# EAGLE board OOBD-Cup_v6 (EAGLE 5.11)
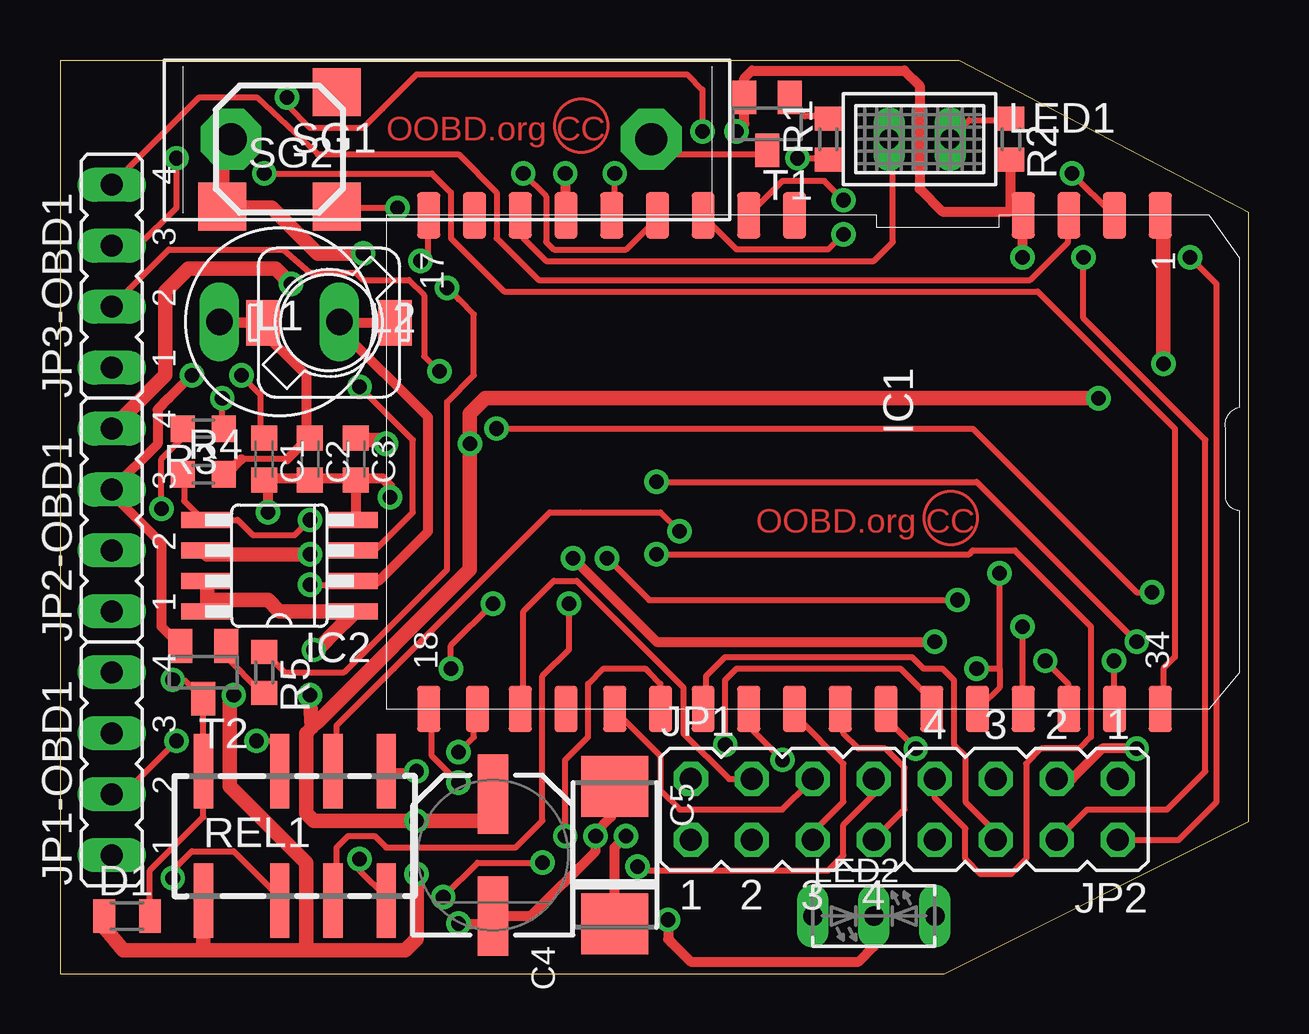
[diagram p0: board, top side]
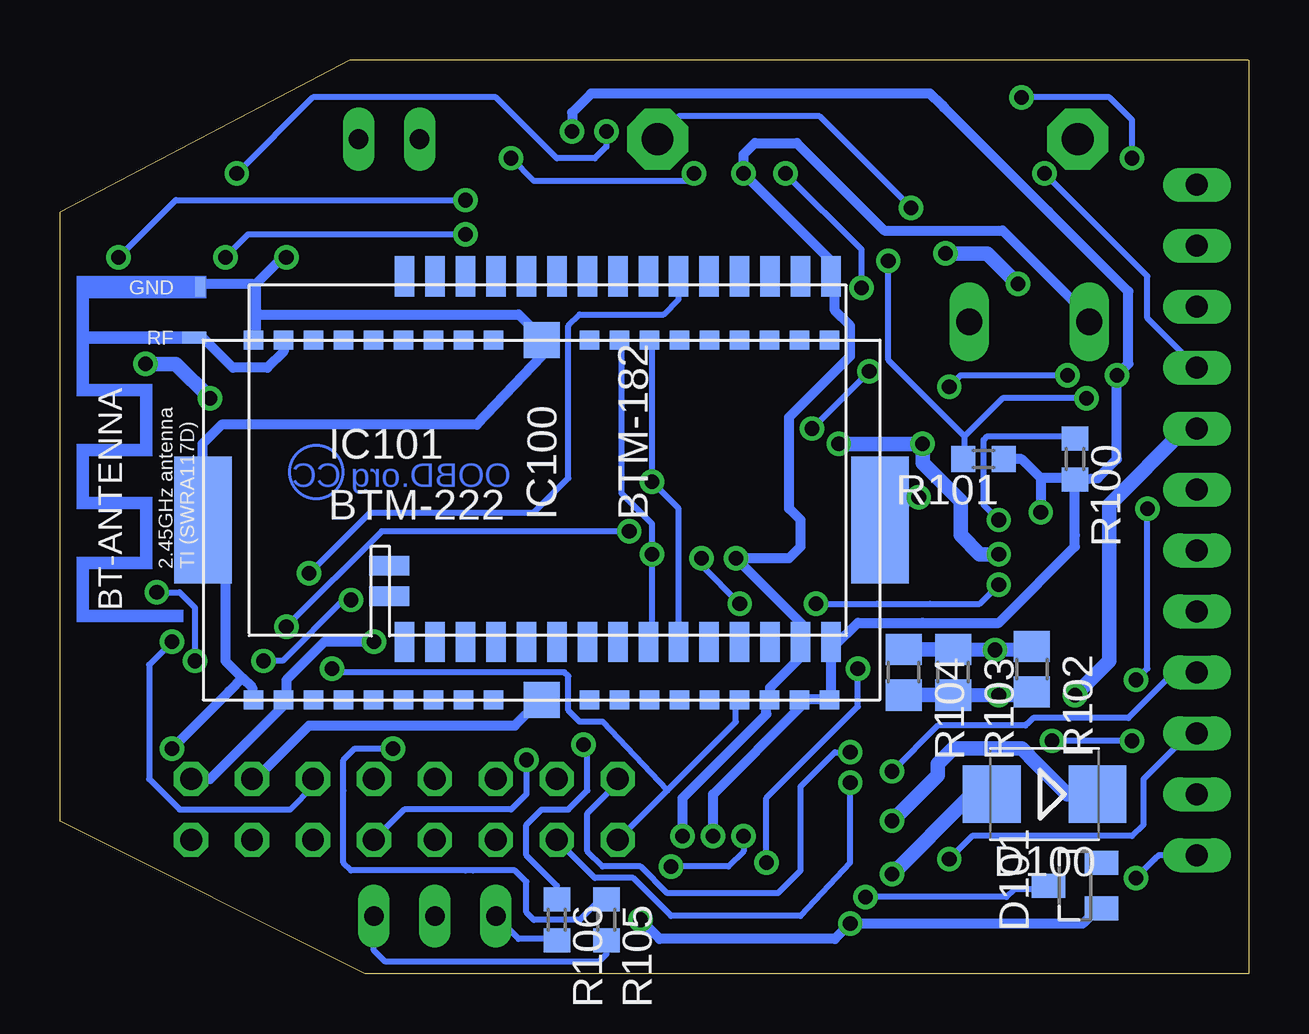
[diagram p1: board, bottom side, seen from below]

Size 49.53 x 38.1 mm. Coordinates in mm from the lower left corner, seen from the top.
Outline: 0,38.09 0,0 36.84,0 49.53,6.35
Outline: 0.01,38.1 37.46,38.1
Outline: 37.46,38.09 49.53,31.75 49.53,6.36
Copper layers (1*16): Top 0.035mm / dielectric 1.5mm / Bottom 0.035mm
Design rules "default *": minimum track width 10mil, minimum drill 24mil, track to track 8mil, track to pad 8mil, pad to pad 8mil, via to via 8mil, smd to smd 8mil, copper to edge 12mil, drill to drill 8mil, minimum pad ring 10mil, minimum via ring 8mil, stop-mask expansion 4mil, vias tented up to drill 0mil, thermal gap 10mil

## Footprints (pad centres in the part's own frame; a part is rotated, then mirrored left to right if it is on the bottom)
SWRA117D_RIGHT = smd 0.813 x 0.406: GND -0.45,0.25 | smd 0.508 x 1.016: RF -2.55,0.5
C0603K = smd 1.05 x 1.08: 1 -0.875,0; 2 0.875,0
SV-D = smd 3.302 x 1.27: + -2.54,0; - 2.54,0
C6032-TE-C = smd 2.54 x 2.794: + 2.857,0; - -2.857,0
MICROMELF-W = smd 0.9 x 1.4: A 0.95,0; C -0.95,0
SMB = smd 2.4 x 2.4: A 2.2,0; C -2.2,0
SOT23 = smd 1 x 1.4: 1 -0.95,-1.1; 2 0.95,-1.1; 3 0,1.1
DMX1-MINI = smd 1.93 x 0.965: 1 0,32.258; 2 0,30.353; 3 0,28.448; 4 0,26.543; 9 0,17.018; 10 0,15.113; 11 0,13.208; 12 0,11.303; 13 0,9.398; 14 0,7.493; 15 0,5.588; 16 0,3.683; 17 0,1.778; 18 20.574,1.778; 19 20.574,3.81; 20 20.574,5.588; 21 20.574,7.493; 22 20.574,9.525; 23 20.574,11.43; 24 20.574,13.208; 25 20.574,15.113; 26 20.574,17.018; 27 20.574,18.923; 28 20.574,20.828; 29 20.574,22.733; 30 20.574,24.638; 31 20.574,26.543; 32 20.574,28.448; 33 20.574,30.353; 34 20.574,32.258
SO8 = smd 0.66 x 2.032: 1 -1.905,-3.073; 2 -0.635,-3.073; 3 0.635,-3.073; 4 1.905,-3.073; 5 1.905,3.073; 6 0.635,3.073; 7 -0.635,3.073; 8 -1.905,3.073
BTM-182 = smd 1.676 x 0.813: P$1 -7.62,7.62; P$2 -7.62,6.35; P$3 -7.62,5.08; P$4 -7.62,3.81; P$5 -7.62,2.54; P$6 -7.62,1.27; P$7 -7.62,0; P$8 -7.62,-1.27; P$9 -7.62,-2.54; P$10 -7.62,-3.81; P$11 -7.62,-5.08; P$12 -7.62,-6.35; P$13 -7.62,-7.62; P$14 -7.62,-8.89; P$15 -7.62,-10.16; P$16 7.62,-10.16; P$17 7.62,-8.89; P$18 7.62,-7.62; P$19 7.62,-6.35; P$20 7.62,-5.08; P$21 7.62,-3.81; P$22 7.62,-2.54; P$23 7.62,-1.27; P$24 7.62,0; P$25 7.62,1.27; P$26 7.62,2.54; P$27 7.62,3.81; P$28 7.62,5.08; P$29 7.62,6.35; P$30 7.62,7.62 | smd 0.813 x 1.676: P$31 -4.445,8.255; P$32 -5.715,8.255
BTM-222 = smd 0.8 x 0.8: P$1 -12.635,-7.5; P$2 -11.385,-7.5; P$3 -10.135,-7.5; P$4 -8.885,-7.5; P$5 -7.635,-7.5; P$6 -6.385,-7.5; P$7 -5.135,-7.5; P$8 -3.885,-7.5; P$9 -2.635,-7.5; P$11 1.365,-7.5; P$12 2.615,-7.5; P$13 3.865,-7.5; P$14 5.115,-7.5; P$15 6.365,-7.5; P$16 7.615,-7.5; P$17 8.865,-7.5; P$18 10.115,-7.5; P$19 11.365,-7.5; P$20 11.365,7.5; P$21 10.115,7.5; P$22 8.865,7.5; P$23 7.615,7.5; P$24 6.365,7.5; P$25 5.115,7.5; P$26 3.865,7.5; P$27 2.615,7.5; P$28 1.365,7.5; P$30 -2.635,7.5; P$31 -3.885,7.5; P$32 -5.135,7.5; P$33 -6.385,7.5; P$34 -7.635,7.5; P$35 -8.885,7.5; P$36 -10.135,7.5; P$37 -11.385,7.5; P$38 -12.635,7.5 | smd 1.5 x 1.5: P$10 -0.635,-7.5; P$29 -0.635,7.5 | smd 2.4 x 5.3: P$AGND -14.735,0; P$BGND 13.465,0
JP4Q = drill 0.914 octagon: 1 -3.81,-1.27; 2 -3.81,1.27; 3 -1.27,-1.27; 4 -1.27,1.27; 5 1.27,-1.27; 6 1.27,1.27; 7 3.81,-1.27; 8 3.81,1.27
JP4 = drill 0.914 long: 1 -3.81,0; 2 -1.27,0; 3 1.27,0; 4 3.81,0
07HCP-XXXX-50 = drill 1.1 long: 1 -2.5,0; 2 2.5,0
PIS2408 = smd 1.9 x 1.4: P$1 0,2.75; P$2 0,-2.75
U57X32 = drill 0.813 long: A -1.27,0; K 1.27,0
DUOLED2X5 = drill 0.813 long: AG -2.54,0; AR 2.54,0; K 0,0
R0603 = smd 1 x 1.1: 1 -0.85,0; 2 0.85,0
R0805 = smd 1.3 x 1.5: 1 -0.95,0; 2 0.95,0
FTR-B4GA = smd 0.8 x 3.1: 1 -3.8,-3.167; 2 -0.625,-3.167; 3 1.597,-3.167; 4 3.82,-3.167; 5 3.82,2.23; 6 1.597,2.23; 7 -0.625,2.23; 8 -3.8,2.23
PMB24F/V = drill 1.321 pad 2.54 octagon: 1 -9.004,0; 2 8.504,0
BME0603SA = smd 2 x 2: (+)LEAD 4.295,0.425; (-)LEAD -0.475,0.425; NC -0.475,-4.345

## Placement (x,y rotation side)
BT-ANTENNA  [SWRA117D_RIGHT]  43.43,29.08 90 bottom
C1  270pF  [C0603K]  8.51,21.46 270 top
C2  1µF  [C0603K]  10.41,21.46 270 top
C3  100nF  [C0603K]  12.32,21.46 270 top
C4  47µ/35V  [SV-D]  18.03,4.95 270 top
C5  220µF/6V  [C6032-TE-C]  23.11,4.95 270 top
D1  1N4148  [MICROMELF-W]  2.79,2.41 0 top
D100  B140  [SMB]  8.51,7.49 180 bottom
D101  BAS40  [SOT23]  7.24,3.68 90 bottom
IC1  DXM1  [DMX1-MINI]  13.59,31.62 270 top
IC2  MC34063-SO  [SO8]  9.14,17.02 90 top
IC100  BTM-182  [BTM-182]  27.56,21.46 90 bottom
IC101  BTM-222  [BTM-222]  28.83,18.92 0 bottom
JP1  SPI / SD-Card  [JP4Q]  30.1,6.86 0 top
JP1-OBD1  [JP4]  2.16,8.76 90 top
JP2  Programm  [JP4Q]  40.26,6.86 180 top
JP2-OBD1  [JP4]  2.16,18.92 90 top
JP3-OBD1  [JP4]  2.16,29.08 90 top
L1  47µH  [07HCP-XXXX-50]  9.14,27.18 0 top
L2  47uH  [PIS2408]  11.21,27.15 90 top
LED1  Ge, Low Current  [U57X32]  35.81,34.8 0 top
LED2  Rt/Gr  [DUOLED2X5]  33.91,2.41 0 top
R1  4K7  [R0603]  32,34.8 90 top
R2  680R  [R0603]  39.62,34.8 270 top
R3  180k  [R0603]  5.97,22.73 180 top
R4  5k6  [R0603]  5.97,20.83 0 top
R5  4K7  [R0603]  8.51,12.57 270 top
R100  3k3  [R0603]  7.24,21.46 270 bottom
R101  47k  [R0603]  11.05,21.46 180 bottom
R102  1R  [R0805]  9.04,12.7 270 bottom
R103  1R  [R0805]  12.32,12.57 270 bottom
R104  1R  [R0805]  14.38,12.57 270 bottom
R105  82R  [R0603]  26.77,2.25 270 bottom
R106  82R  [R0603]  28.83,2.25 270 bottom
REL1  FTR-B4GA  [FTR-B4GA]  9.78,6.22 0 top
SG1  PMB24FV  [PMB24F/V]  16.13,34.8 0 top
SG2  MBWOE  [BME0603SA]  11.05,32.42 180 top
T1  BC847  [SOT23]  29.46,35.43 180 top
T2  BC847  [SOT23]  5.97,12.57 180 top

## Library data of the parts
BT-ANTENNA = ant-planar-1
C1-C3 R1-R5 R100-R106 = rcl
C4 = cap-master
C5 = rc-master
D1 D100 D101 = diode
IC1 = DXM
IC2 = mc34063
IC100 = BTM182
IC101 = btm-222
JP1 JP1-OBD1 JP2 JP2-OBD1 JP3-OBD1 = jumper
L1 L2 = Inductor-Fastron
LED1 LED2 = led
REL1 = relay; MN: Fujitsu; MPN: FTR-B4GAxxxZ; OC_REICHELT: FTR-B4GA 12V
SG1 = buzzer; OC_CONRAD: Best.-Nr.: 752223 - 62 [Teilenummer: 185110]
SG2 = buzzer; MF: Grewus
T1 T2 = transistor

## Nets
3V3OUT: IC1.9
12V_DOUT: C3.1 C4.+ D100.C IC1.1 IC2.6 R102.2 R103.2 R104.2
+3V3: C2.1 C5.+ IC1.14 IC100.P$14 IC100.P$16 IC101.P$2 IC101.P$17 JP2.1 L1.1 L2.P$1 R4.2
+12V: D1.C D100.A JP2-OBD1.4 REL1.1 SG1.1 SG2.(+)LEAD
A0: IC1.18 JP1.3
BOOT0: IC1.10 JP2.2
CS: IC1.19 JP1.2
CTS: IC1.26 JP1.5
GND: BT-ANTENNA.GND C1.2 C2.2 C3.2 C4.- C5.- D101.1 IC1.4 IC2.4 IC100.P$15 IC101.P$1 IC101.P$10 IC101.P$18 IC101.P$19 IC101.P$29 IC101.P$38 IC101.P$AGND IC101.P$BGND JP2-OBD1.3 JP2.3 LED2.K R2.2 R100.2 R101.1 T1.2 T2.2
HS_CAN-H: JP1-OBD1.1 REL1.2
HS_CAN-L: JP1-OBD1.2 REL1.7
K-LINE: IC1.33 JP3-OBD1.2
L-LINE: IC1.34 JP3-OBD1.1
MISO: IC1.22 JP1.6
MODE1: IC1.29 R106.1
MODE2: IC1.28 R105.1
MOSI: IC1.23 JP1.8
MS_CAN-H: JP1-OBD1.3 REL1.4
MS_CAN-L: JP1-OBD1.4 REL1.5
N$1: IC2.5 R4.1 R100.1
N$2: C1.1 IC2.3
N$4: LED2.AR R105.2
N$5: IC2.1 IC2.7 IC2.8 R102.1 R103.1 R104.1
N$6: LED2.AG R106.2
N$7: LED1.K R2.1
N$8: IC1.15 LED1.A
N$19: IC1.17 R3.1 R101.2
N$20: R5.2 T2.1
N$21: IC1.32 REL1.3
N$22: IC1.31 REL1.6
N$23: SG1.2 SG2.(-)LEAD T1.3
N$24: R1.2 T1.1
N$25: IC1.12 R5.1
N$26: IC1.13 R1.1
N$27: D1.A R3.2 REL1.8 T2.3
N$29: D101.3 IC2.2 L1.2 L2.P$2
PWM+: IC1.2 JP3-OBD1.3
PWM-: IC1.3 JP3-OBD1.4
RESET-: IC1.30 IC100.P$21 IC101.P$16 JP1.1
RESETN: IC1.11 JP2.4
RF: BT-ANTENNA.RF IC101.P$37
RTS: IC1.27 JP1.7
RX: IC100.P$10 IC101.P$26 JP2.5
RXD: IC1.25 JP2.8
SCK: IC1.20 JP1.4
TX: IC100.P$9 IC101.P$27 JP2.7
TXD: IC1.24 JP2.6

## Tracks (layer width: path | path; a pad name or v marks a point on that pad's centre or on a via)
12V_DOUT  (via drill 0.61)
  Top 0.254: 12.32,22.26 C3.1
  Top 0.61: C4.+ 18.03,7.17 18.03,6.38 v14.86,6.38 14.38,6.38 11.68,6.38 11.53,6.38 10.57,6.38 10.25,6.7 10.25,10.03 | 12.32,22.26 13.43,22.26 v13.59,22.1 | v45.97,25.43 45.97,25.59 45.97,31.46 IC1.1 | v43.27,24 37.72,24 20.41,24 17.72,24 17.08,23.37 v17.08,22.1 17.08,16.86 10.73,10.51 10.49,10.27 | v10.41,17.49 6.13,17.49 IC2.6 | 10.25,10.03 | 10.25,10.03 10.49,10.27 | 10.49,10.27 v10.41,11.62
  Bottom 0.254: D100.C 6.44,7.49 | v17.08,22.1 16.92,21.94
  Bottom 0.61: 6.44,7.49 7.56,7.49 8.83,8.76 9.46,9.4 9.62,9.4 12.32,9.4 12.48,9.24 12.95,8.76 12.95,8.6 12.95,8.29 v14.86,6.38 | v17.08,22.1 v13.59,22.1 13.59,21.3 12.64,20.35 | v43.27,24 44.7,25.43 44.86,25.43 v45.97,25.43 | v10.41,17.49 11.21,17.49 12,18.29 12,19.72 12.64,20.35 | 12.64,20.35 13.11,20.83 12.64,20.35 | R103.2 9.46,11.62 9.17,11.62 R102.2 | R103.2 R104.2 | v10.41,11.62 R103.2
+3V3  (via drill 0.61)
  Top 0.254: 9.46,21.46 7.56,21.46 | 10.25,22.26 C2.1 10.25,22.42 | 6.92,20.83 R4.2 | 21.05,31.62 IC1.14
  Top 0.406: 10.25,22.26 9.46,21.46 | 7.56,21.46 6.92,20.83 | 10.25,22.42 10.25,24.96 8.03,27.18 L1.1 6.93,27.15 L2.P$1 | v21.05,33.37 21.05,31.62 | C5.+ 23.11,5.27 v23.59,5.75 | v36.45,13.84 24.86,13.84 v21.37,17.34
  Bottom 0.254: IC101.P$2 40.1,11.3 | 19.94,11.46 IC101.P$17 20.1,11.3 | 18.67,13.68 IC100.P$14 | 17.24,28.92 IC100.P$16
  Bottom 0.406: 40.1,11.3 43.27,8.13 43.91,8.13 JP2.1 | 19.94,11.46 19.94,11.94 18.67,13.21 18.67,13.68 | 17.24,28.92 17.24,27.65 16.61,27.02 16.61,25.75 19.14,23.21 19.14,19.4 18.67,18.92 18.67,17.81 | IC100.P$14 18.51,14.48 v21.37,17.34 | v21.37,17.34 | v21.37,17.34 | 19.14,17.34 18.67,17.81 | IC100.P$16 17.4,29.72 v21.05,33.37 21.05,34.16 20.57,34.64 18.83,34.64 15.18,30.99 10.25,30.99 6.6,27.34 L1.1 | v23.59,5.75 23.59,7.33 20.1,10.83 20.1,11.3 | v36.45,13.84 38.51,13.84 40.1,12.26 40.1,11.46 IC101.P$2 | 19.14,17.34 18.67,17.81 | v21.37,17.34 19.14,17.34 | v21.37,17.34 | 19.14,17.34 18.67,17.81 | v21.37,17.34 19.14,17.34
+12V  (via drill 0.61)
  Top 0.254: 6.76,31.94 SG2.(+)LEAD 6.76,31.78 | 7.08,34.64 SG1.1
  Top 0.61: 6.76,31.94 6.76,34.32 7.08,34.64 | 5.97,0.98 4.54,0.98 2.63,0.98 1.84,1.94 D1.C | 5.97,0.98 REL1.1 5.97,0.98 | v14.86,4.16 14.86,1.46 14.38,0.98 10.25,0.98 | 10.25,0.98 7.56,0.98 5.97,0.98 | v7.24,11.62 7.08,11.3 7.08,9.72 7.08,7.81 10.25,4.64 10.25,0.98 | 6.76,31.78 6.92,31.94 8.83,31.94 10.73,30.03 v12.64,30.03 | v12.64,30.03 | v9.62,28.77 8.98,29.4 5.33,29.4 4.38,28.45 4.38,24.96 JP2-OBD1.4
  Bottom 0.61: v14.86,4.16 11.68,7.33 10.73,7.33 D100.A | v7.24,11.62 5.81,13.05 5.81,19.56 2.63,22.73 JP2-OBD1.4 | v12.64,30.03 10.89,30.03 v9.62,28.77
A0  (via drill 0.61)
  Top 0.254: v16.61,7.97 15.49,9.08 15.49,10.99 IC1.18
  Bottom 0.254: v16.61,7.97 16.61,4.64 18.67,2.41 24.07,2.41 25.65,4 27.24,4 28.67,5.43 JP1.3
BOOT0  (via drill 0.61)
  Top 0.254: 28.67,31.62 | 28.67,31.62 30.1,33.05 30.26,33.05 31.84,33.05 v32.64,32.26 | v47.09,29.88 47.24,29.72 48.2,28.77 48.2,7.17 46.61,5.59 JP2.2 | 28.67,31.62 IC1.10
  Bottom 0.254: v32.64,32.26 44.7,32.26 v47.09,29.88
CS  (via drill 0.61)
  Top 0.254: v16.61,9.24 17.24,9.87 17.24,10.99 IC1.19
  Bottom 0.254: v16.61,9.24 17.24,9.24 18.67,7.81 18.67,4.32 19.62,3.37 24.23,3.37 25.34,4.48 26.92,4.48 27.56,5.11 27.56,6.7 26.29,7.97 JP1.2
CTS
  Top 0.254: JP1.5 31.37,5.91 32.64,7.18 32.64,8.76 30.73,10.67 30.73,10.99 IC1.26
GND  (via drill 0.61)
  Top 0.254: 17.72,2.1 C4.- | 22.95,7.65 C5.- | 8.51,20.67 C1.2 | 8.67,20.67 C2.2 10.41,20.67 | 12.32,20.51 C3.2 12.16,20.67 | 12.32,18.92 IC2.4 | T2.2 | 39.62,33.85 R2.2 | 40.1,31.62 IC1.4 40.1,31.46 | 25.5,1.3 | v25.34,2.25
  Top 0.406: v16.61,2.1 17.72,2.1 | 22.95,7.65 22.95,6.54 22.32,5.91 v22.32,5.75 22.32,5.11 19.62,2.41 C4.- | 8.67,20.67 8.51,20.67 | 12.32,20.51 12.32,18.92 | 10.41,20.67 12.16,20.67 | T2.2 4.22,14.48 4.22,17.97 2.16,20.03 JP2-OBD1.3 4.06,22.1 4.06,23.53 4.54,24 v5.49,24.96 | 8.19,20.51 8.35,20.51 C1.2 | 39.62,32.1 39.62,31.78 36.77,31.78 35.81,32.73 35.81,34 35.81,37.02 35.18,37.66 28.83,37.66 28.51,37.34 T1.2 28.51,35.43 v28.19,35.11 | 39.62,32.1 39.62,33.85 | 39.62,32.1 40.1,31.62 | 40.1,31.46 v40.1,29.88 | JP2.3 42.16,8.13 43.43,9.4 v44.86,9.4 | LED2.K 33.91,1.14 33.27,0.51 26.29,0.51 25.5,1.3 25.34,1.46 v25.34,2.25 | 8.67,20.67 13.43,20.67 13.75,20.35 v13.75,19.88 | v8.67,19.24 8.67,20.67
  Bottom 0.254: D101.1 6.29,2.73 | 17.56,11.46 IC101.P$19 17.4,11.46 | IC101.P$18 18.67,11.46 | 17.4,13.68 IC100.P$15 17.24,13.68 | 7.24,20.67 R100.2 | 29.62,11.3 29.46,11.3 IC101.P$10 | 41.53,11.46 IC101.P$1 | IC101.P$AGND 43.43,18.76 | IC101.P$38 41.53,26.38
  Bottom 0.406: 6.29,2.73 6.92,2.1 v16.61,2.1 17.24,1.46 24.54,1.46 v25.34,2.25 | 18.67,11.46 17.56,11.46 | 17.4,11.46 17.4,13.68 | 8.67,20.67 7.24,20.67 7.24,18.29 | 8.67,20.67 9.46,21.46 R101.1 | 17.24,13.68 16.29,14.64 13.59,14.64 10.41,14.64 10.25,14.8 7.24,17.81 | 7.24,17.81 7.24,18.29 | R100.2 6.29,20.67 5.49,21.46 v5.49,24.96 5.02,25.43 5.02,28.45 8.35,31.78 12.64,36.07 12.79,36.23 13.27,36.7 13.43,36.7 14.06,36.7 27.4,36.7 28.19,35.91 v28.19,35.11 | v22.32,5.75 22.32,7.49 18.67,11.14 IC101.P$18 | 29.62,11.3 30.57,10.35 36.61,10.35 39.15,10.35 41.37,8.13 JP2.3 | 41.53,11.46 41.53,11.94 41.93,12.34 | 41.93,12.34 42.64,13.05 42.64,18.76 43.43,18.76 | 42.8,22.89 | 42.8,22.89 43.59,22.1 IC101.P$AGND | v40.1,29.88 40.26,29.88 41.37,28.77 41.37,27.65 | 41.37,27.65 41.37,26.86 41.53,26.7 IC101.P$38 41.46,26.32 41.37,27.18 41.37,28.61 41.53,28.77 42.01,28.77 43.59,28.77 43.68,28.7 BT-ANTENNA.GND | v44.86,9.4 42.48,11.78 41.93,12.34 | IC101.P$29 29.46,26.54 30.42,27.5 41.21,27.5 41.37,27.65 | IC101.P$29 29.46,26.38 | 42.8,22.89 32.16,22.89 29.46,25.75 IC101.P$29 | 42.8,22.89 | 42.8,22.89 | v13.75,19.88 13.91,19.72 14.22,19.72 14.38,19.56 15.33,19.72 15.36,19.88 IC101.P$BGND | 8.67,20.67 8.59,20.59 | 8.59,20.59 8.67,20.67 | 8.67,20.67 v8.67,19.24 | 8.67,20.67 8.59,20.59 | 7.24,17.81 7.24,18.29
HS_CAN-H  (via drill 0.61)
  Top 0.254: v4.7,4 4.7,4.32 5.49,5.11 7.24,5.11 9.14,3.21 REL1.2
  Bottom 0.254: v4.7,4 3.9,4.79 3.75,4.95 JP1-OBD1.1
HS_CAN-L  (via drill 0.61)
  Top 0.254: JP1-OBD1.2 2.63,7.49 v4.86,9.72 | v8.19,9.72 8.98,9.72 9.14,9.56 | 9.14,9.56 | 9.14,9.56 9.14,8.6 REL1.7
  Bottom 0.254: v4.86,9.72 v8.19,9.72
K-LINE  (via drill 0.61)
  Top 0.254: v43.91,13.05 43.91,11.14 IC1.33 | v45.5,15.91 44.86,15.91 38.04,22.73 35.66,22.73 v18.19,22.73 | v15.81,25.11 15.18,25.75 15.18,28.29 14.54,28.92 12.64,28.92 12.32,29.24 10.41,29.24 9.3,30.19 4.54,30.19 JP3-OBD1.2
  Bottom 0.254: v43.91,13.05 43.91,15.27 44.55,15.91 v45.5,15.91 | v15.81,25.11 v18.19,22.73
L-LINE  (via drill 0.61)
  Top 0.254: v8.51,33.37 15.49,33.37 16.29,32.58 16.29,30.67 18.51,28.45 40.73,28.45 46.45,22.73 46.45,13.21 45.97,12.73 45.97,11.14 IC1.34
  Bottom 0.254: v8.51,33.37 4.22,29.08 4.22,27.34 JP3-OBD1.1
MISO
  Top 0.254: IC1.22 23.11,10.99 25.02,9.08 25.02,7.65 25.81,6.86 30.1,6.86 31.21,7.97 JP1.6
MODE1  (via drill 0.61)
  Top 0.254: v27.72,9.56 27.72,12.26 28.19,12.73 35.02,12.73 36.29,11.46 IC1.29
  Bottom 0.254: v27.72,9.56 27.56,9.4 27.56,7.65 28.35,6.86 29.46,6.86 30.1,6.22 30.1,4.95 28.83,3.68 28.83,3.21 R106.1
MODE2  (via drill 0.61)
  Top 0.254: IC1.28 34.42,10.64 v35.66,9.4
  Bottom 0.254: R105.1 27.03,3.1 27.88,2.25 29.78,2.25 30.1,2.57 30.1,3.84 30.57,4.32 32.32,4.32 32.64,4.32 37.4,4.32 37.72,4.64 37.72,7.65 37.72,8.92 37.24,9.4 v35.66,9.4
MOSI  (via drill 0.61)
  Top 0.254: v21.05,5.75 21.05,8.92 22,9.87 22,12.1 22.64,12.73 24.38,12.73 24.54,12.57 25.02,12.1 IC1.23 | v24.07,4.48 24.23,4.32 32,4.32 32.64,4.95 32.64,6.22 33.91,7.49 JP1.8
  Bottom 0.254: v21.05,5.75 21.05,5.11 21.68,4.48 v24.07,4.48
MS_CAN-H  (via drill 0.61)
  Top 0.254: v12.48,4.79 12.48,4.32 13.59,3.21 REL1.4
  Bottom 0.254: v12.48,4.79 11.53,5.75 4.86,5.75 4.38,6.22 4.38,8.13 2.48,10.03 JP1-OBD1.3
MS_CAN-L  (via drill 0.61)
  Top 0.254: v14.86,8.45 13.75,8.45 REL1.5
  Bottom 0.254: 9.14,10.51 8.98,10.67 5.02,10.67 3.27,12.41 2.16,12.41 JP1-OBD1.4 | 9.14,10.51 9.3,10.35 | 9.3,10.35 9.14,10.51 | 9.14,10.51 9.3,10.35 | 9.3,10.35 12.95,10.35 | 12.95,10.35 | 12.95,10.35 | 12.95,10.35 v14.86,8.45
N$1  (via drill 0.61)
  Top 0.254: R4.1 5.17,20.67 5.17,19.72 5.97,18.92 IC2.5 6.13,18.92 7.4,18.92 8.03,18.29 9.78,18.29 v10.41,18.92 | v10.41,18.92
  Bottom 0.254: v10.41,18.92 11.05,19.56 11.05,20.67 11.05,22.26 10.89,22.42 7.24,22.42 R100.1
N$2  (via drill 0.61)
  Top 0.254: v7.56,24.96 8.35,24.16 8.35,22.42 C1.1 | v12.48,24.48 14.7,22.26 14.7,19.24 13.11,17.65 12.32,17.65 IC2.3
  Bottom 0.254: v7.56,24.96 12,24.96 v12.48,24.48
N$4
  Bottom 0.254: R105.2 26.77,0.83 27.08,0.51 35.97,0.51 36.45,0.98 LED2.AR
N$5  (via drill 0.61)
  Top 0.254: 6.13,16.22 IC2.7 | 11.29,14.08 12.16,14.95 IC2.1
  Top 0.61: 6.13,15.59 6.13,16.22 | 6.13,15.59 6.13,15.11 IC2.8 | 6.13,15.59 8.67,15.59 9.14,15.11 12.32,15.11 11.29,14.08 10.73,13.51 v10.57,13.51
  Bottom 0.61: R103.1 12.29,13.5 | R102.1 9.16,13.53 9.62,13.53 v10.57,13.51 | v10.57,13.51 10.73,13.51 | 10.73,13.51 R103.1 | R103.1 R104.1 | v10.57,13.51 10.73,13.51
N$6
  Bottom 0.254: R106.2 28.83,1.46 30.42,1.46 31.21,2.25 LED2.AG
N$7
  Top 0.254: LED1.K 37.88,35.59 39.46,35.59 R2.1
N$8
  Top 0.254: IC1.15 19.3,31.46 19.3,30.67 20.26,29.72 33.91,29.72 34.7,30.51 34.7,34.48 34.54,34.64 LED1.A
N$19  (via drill 0.61)
  Top 0.254: v6.76,24 6.76,22.73 R3.1 | v15.02,29.72 15.33,30.03 15.33,31.46 IC1.17
  Bottom 0.254: v6.76,24 10.25,24 11.76,22.49 | 11.76,22.49 11.84,22.42 | 11.84,22.42 11.84,21.46 R101.2 | v15.02,29.72 15.02,25.59 11.84,22.42 | 11.76,22.49 11.84,22.42
N$20
  Top 0.254: R5.2 8.35,11.78 6.92,13.21 6.92,13.53 T2.1
N$21  (via drill 0.61)
  Top 0.254: v41.05,13.05 42.01,12.1 42.01,11.14 IC1.32 | v37.4,15.59 24.54,15.59 v22.8,17.34 | v21.21,15.43 21.21,13.53 20.1,12.41 20.1,6.38 18.99,5.27 13.59,5.27 13.11,5.75 12,5.75 11.53,5.27 11.53,3.21 REL1.3
  Bottom 0.254: v41.05,13.05 40.26,13.05 37.72,15.59 v37.4,15.59 | v22.8,17.34 22.8,17.02 v21.21,15.43
N$22  (via drill 0.61)
  Top 0.254: v40.1,14.48 40.1,11.14 IC1.31 | v25.81,18.45 25.02,19.24 21.68,19.24 20.41,19.24 13.91,12.73 11.53,10.35 11.53,8.6 REL1.6
  Bottom 0.254: v40.1,14.48 36.13,18.45 v25.81,18.45
N$23  (via drill 0.61)
  Top 0.254: T1.3 29.3,34.32 29.15,34.16 25.18,34.16 24.7,34.64 SG1.2 | v14.06,31.94 11.53,31.94 SG2.(-)LEAD
  Bottom 0.254: v14.06,31.94 | v14.06,31.94 17.88,35.75 23.75,35.75 24.7,34.8 SG1.2
N$24
  Top 0.254: R1.2 31.84,35.75 31.05,35.75 30.42,36.39 T1.1
N$25  (via drill 0.61)
  Top 0.254: 16.13,23.84 17.24,24.96 17.24,27.5 16.61,28.13 16.45,28.29 v16.13,28.61 | v19.3,33.37 20.26,32.42 20.26,30.51 20.57,30.19 23.59,30.19 24.86,31.46 IC1.12 | 16.13,23.84 | 16.13,23.84 16.13,16.86 15.18,15.91 | 15.18,15.91 | 11.84,12.57 15.18,15.91 | 11.84,12.57 9.36,12.57 R5.1 | 11.84,12.57 | 11.84,12.57
  Bottom 0.254: v16.13,28.61 16.13,30.19 v19.3,33.37
N$26  (via drill 0.61)
  Top 0.254: v30.73,34 31.84,34 R1.1 | v23.11,33.37 23.11,31.62 IC1.13
  Bottom 0.254: v30.73,34 29.78,33.05 23.43,33.05 v23.11,33.37
N$27  (via drill 0.61)
  Top 0.254: D1.A 3.75,4.32 5.97,6.54 REL1.8 5.97,8.6 T2.3 5.81,11.62 5.17,12.26 v4.7,12.26 | v4.22,19.4 4.22,21.46 5.02,22.26 5.02,22.57 R3.2
  Bottom 0.254: v4.22,19.4 4.22,12.73 v4.7,12.26
N$29  (via drill 0.61)
  Top 0.254: v15.97,3.21 17.4,4.64 v20.1,4.64 | v16.29,12.73 16.29,13.68 v18.03,15.43 | v10.41,16.22 12.16,16.22 IC2.2 12.32,16.38
  Top 0.406: 12.32,16.38 13.27,16.38 15.33,18.45 15.33,23.21 11.68,26.86 11.68,27.18 L1.2 11.93,27.15 L2.P$2
  Bottom 0.254: v15.97,3.21 10.1,3.21 9.78,3.52 8.35,3.52 D101.3 | v20.1,4.64 20.1,7.33 16.29,11.14 v16.29,12.73 | v18.03,15.43 15.49,15.43 13.27,15.43 11.21,15.43 v10.41,16.22
PWM+  (via drill 0.61)
  Top 0.254: v42.16,33.37 43.91,31.62 IC1.2 | v26.77,35.11 26.77,36.86 26.13,37.5 18.51,37.5 14.86,37.5 13.43,36.07 12.64,35.27 10.41,35.27 9.46,36.23 v9.46,36.54 | v4.86,34 4.86,31.94 3.27,30.35 JP3-OBD1.3
  Bottom 0.254: v42.16,33.37 38.99,36.54 31.37,36.54 28.83,34 27.24,34 26.77,34.48 v26.77,35.11 | v4.86,34 4.86,35.59 5.81,36.54 v9.46,36.54 | v9.46,36.54
PWM-
  Top 0.254: JP3-OBD1.4 5.81,36.54 8.19,36.54 10.73,34.16 16.61,34.16 18.19,32.58 18.19,30.67 19.94,28.92 40.42,28.92 42.01,30.51 42.01,31.46 IC1.3
RESET-  (via drill 0.61)
  Top 0.254: 39.15,12.73 39.15,11.94 38.35,11.14 IC1.30 | 39.15,12.73 v39.15,16.7 | v38.2,12.73 39.15,12.73
  Bottom 0.254: JP1.1 24.3,7.57 | 24.3,7.57 24.23,7.65 | 24.23,7.65 21.37,10.51 21.37,11.3 IC101.P$16 | JP1.1 | v39.15,16.7 36.61,19.24 29.78,19.24 28.35,20.67 28.35,27.02 27.88,27.5 24.38,27.5 23.75,28.13 23.75,28.61 23.75,28.92 IC100.P$21 | 24.23,7.65 26.92,10.51 27.88,10.51 28.35,10.99 28.35,12.41 28.51,12.57 38.04,12.57 v38.2,12.73 | 24.3,7.57 24.23,7.65
RESETN  (via drill 0.61)
  Top 0.254: v32.64,30.83 32,30.19 28.19,30.19 26.92,31.46 IC1.11 | v42.64,29.88 42.64,27.34 47.72,22.26 47.72,8.45 46.13,6.86 42.8,6.86 JP2.4
  Bottom 0.254: v32.64,30.83 33.75,30.83 41.69,30.83 v42.64,29.88
RF
  Bottom 0.406: IC101.P$37 40.21,25.95 40.89,25.27 42.32,25.27 42.96,25.91 | 42.96,25.91 | 42.96,25.91 43.12,26.07 43.58,26.53 BT-ANTENNA.RF
RTS
  Top 0.254: JP1.7 35.18,6.86 35.18,8.6 34.54,9.24 34.38,9.4 33.27,9.4 32.64,10.03 32.64,10.99 IC1.27
RX  (via drill 0.61)
  Top 0.254: v44.86,13.84 38.2,20.51 v24.86,20.51
  Bottom 0.254: IC100.P$10 23.75,19.4 v24.86,20.51 24.86,26.38 IC101.P$26 | v44.86,13.84 45.81,12.89 45.81,8.13 44.55,6.86 39.94,6.86 38.99,7.81 38.99,7.97 JP2.5
RXD  (via drill 0.61)
  Top 0.254: v30.1,8.92 28.83,10.19 28.83,10.99 IC1.25
  Bottom 0.254: v30.1,8.92 30.1,7.49 30.73,6.86 35.18,6.86 JP2.8
SCK
  Top 0.254: IC1.20 19.3,11.14 19.3,15.11 20.57,16.38 21.53,16.38 25.97,11.94 25.97,10.03 27.88,8.13 28.67,8.13 JP1.4
TX  (via drill 0.61)
  Top 0.254: v24.86,17.49 37.88,17.49 38.04,17.65 39.78,17.65 42.96,14.48 42.96,9.87 42.48,9.4 40.89,9.4 40.26,8.76 40.26,4.79 39.62,4.16 38.35,4.16 37.72,4.79 37.72,6.06 36.45,7.33 36.45,7.97 JP2.7
  Bottom 0.254: IC101.P$27 26.13,26.38 26.13,20.03 24.86,18.76 v24.86,17.49 24.86,13.84 IC100.P$9
TXD
  Top 0.254: IC1.24 26.92,11.14 26.92,12.41 27.72,13.21 35.5,13.21 35.97,12.73 36.77,12.73 37.24,12.26 37.24,9.56 37.72,9.08 37.72,7.17 38.99,5.91 JP2.6
(copper drawn outside any net)
  shapes: Bottom circle x1, Top circle x2

## Text on the board
Top: OOBD.org CC | OOBD.org CC
Bottom: OOBD.org CC